# Altium PCB PCB_main.PcbDoc
Units mil, origin at the board's own origin, x right, y up, seen from the top; angles counter-clockwise.
Board outline 2110 x 1020 mil, 2 copper layers (Top Layer, Bottom Layer); 36 components, 29 nets, 142 pads, 36 vias.
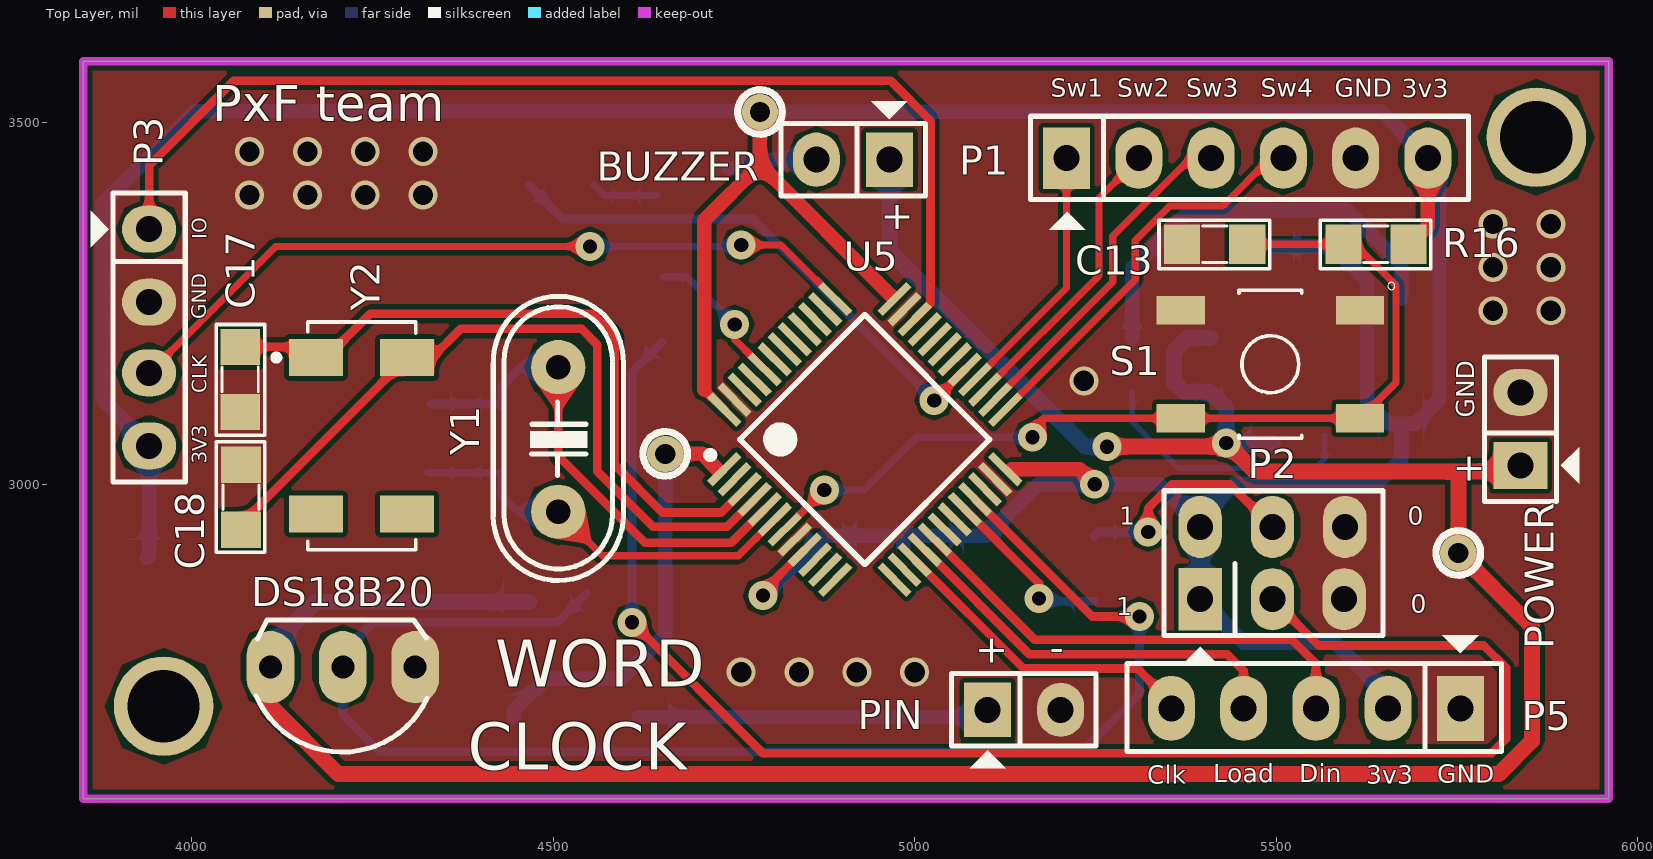
[diagram p0: Top Layer view]
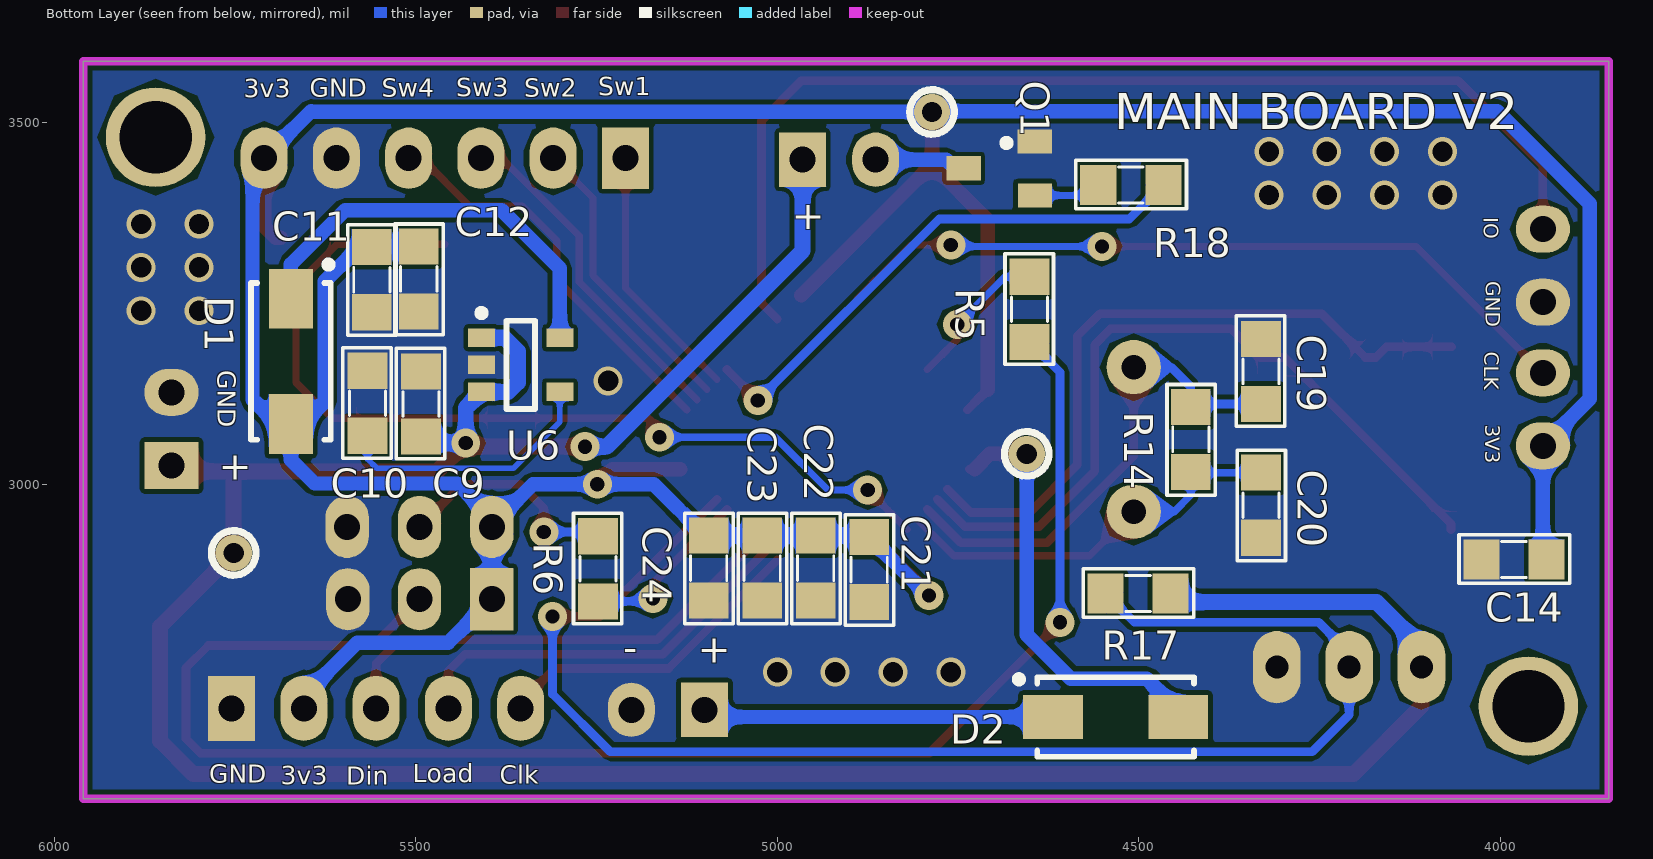
[diagram p1: Bottom Layer view, seen from below]
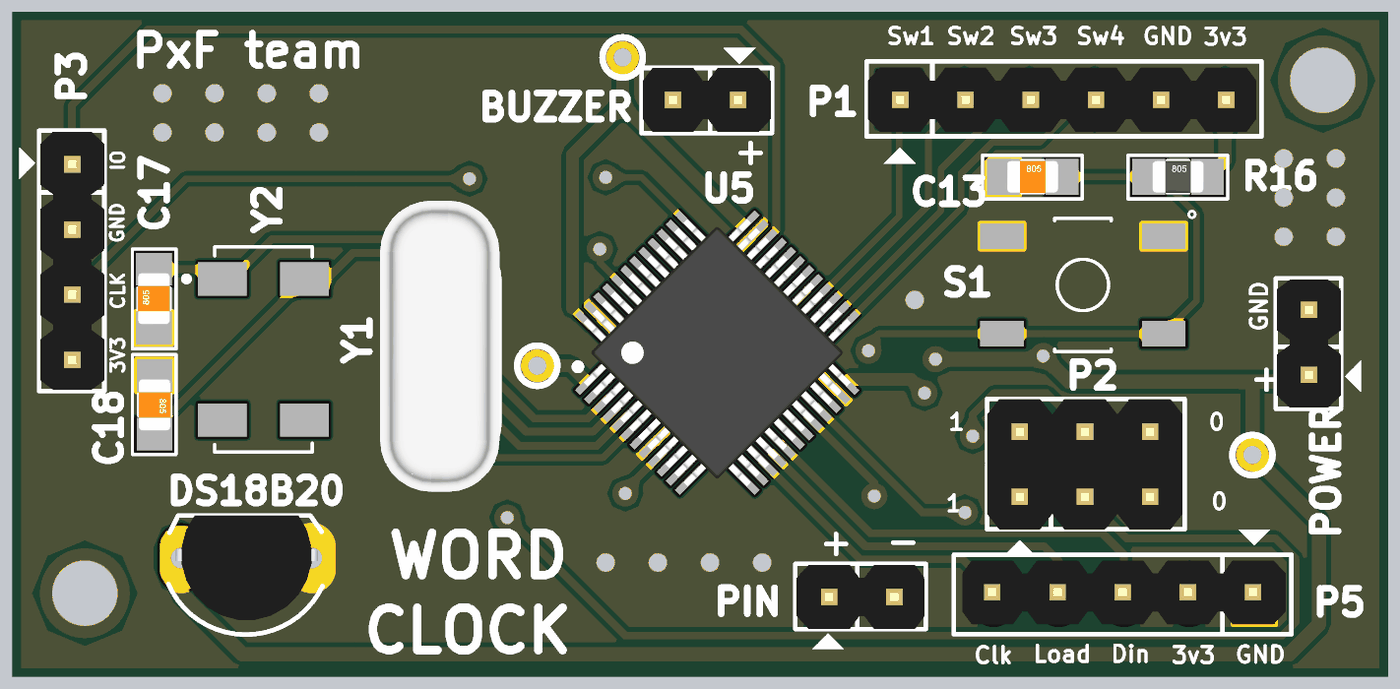
[diagram p2: 3D render of the assembled board from above, using the file's embedded part models]
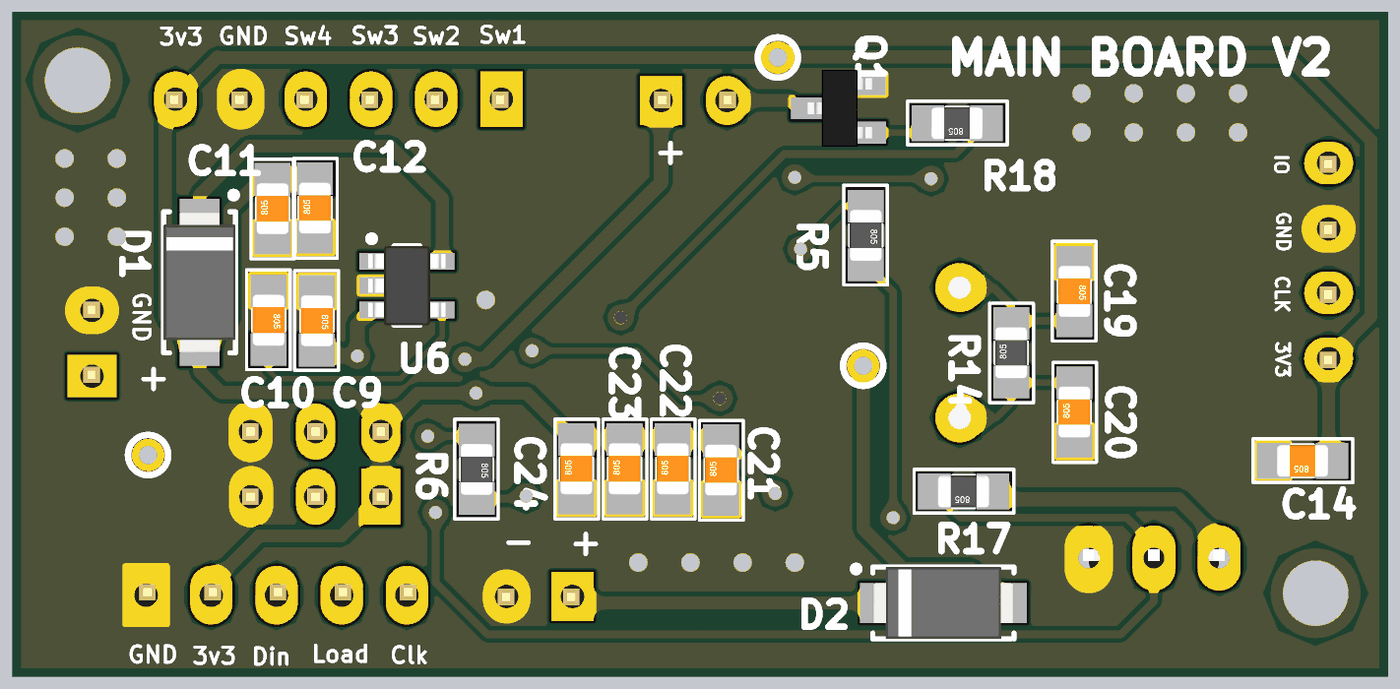
[diagram p3: 3D render of the assembled board from below, using the file's embedded part models]

## Layer stack, top to bottom
Top Solder: solder mask 0.4, Solder Resist, Dk 3.5
Top Layer: signal copper 1.4
Dielectric 1: dielectric 12.6, FR-4, Dk 4.8
Bottom Layer: signal copper 1.4
Bottom Solder: solder mask 0.4, Solder Resist, Dk 3.5

## Board outline
3850,2565 3850,3585 5960,3585 5960,2565

## Design rules (kind name [scope] priority, off if disabled: settings)
Clearance [All] p1: gap=6 ignorepadtopadclearanceinfootprint=FALSE except(0: Arc-Hole Track-Hole SMDPad-Hole THPad-Hole Via-Hole Fill-Hole Poly-Hole Region-Hole Text-Hole)
PlaneConnect [All] p1: planeconnectstyle=Direct reliefexpansion=20 reliefentries=4 reliefconductorwidth=15 reliefairgap=8
PolygonConnect [All] p1: connectstyle=Direct reliefconductorwidth=10 reliefentries=4 polygonreliefangle="90 Angle" airgapwidth=10
RoutingVias [All] p1: holewidth=19.68 width=40 viastyle="Through Hole" minholewidth=15.75 minwidth=40 maxholewidth=27.56 maxwidth=40
SolderMaskExpansion [All] p1: expansion=4
Width [All] p1: maxlimit=50 minlimit=6 preferedwidth=8
29 further rules are at their usual default settings.

## Components (designator, comment, footprint, x,y, rotation, side; value= is the part's Value field where it differs from the comment)
BUZZER "Domino 2" JP2 4965,3449 r180 top (schematic designator P6)
C9 "Cap Non-Pol SMD" CAP-SM-0805 5493,3156 r270 bottom value=105
C10 "Cap Non-Pol SMD" CAP-SM-0805 5567,3157 r270 bottom value=223
C11 "Cap Non-Pol SMD" CAP-SM-0805 5561,3238 r90 bottom value=106
C12 "Cap Non-Pol SMD" CAP-SM-0805 5496,3239 r90 bottom value=104
C13 "Cap Non-Pol SMD" CAP-SM-0805 5370,3332 r0 top value=105
C14 "Cap Non-Pol SMD" CAP-SM-0805 3936,2896 r0 bottom value=104
C17 "Cap Non-Pol SMD" CAP-SM-0805 4067,3100 r90 top value=20p
C18 "Cap Non-Pol SMD" CAP-SM-0805 4068,3027 r270 top value=20p
C19 "Cap Non-Pol SMD" CAP-SM-0805 4331,3201 r270 bottom value=20p
C20 "Cap Non-Pol SMD" CAP-SM-0805 4331,2926 r90 bottom value=20p
C21 "Cap Non-Pol SMD" CAP-SM-0805 4873,2837 r90 bottom value=104
C22 "Cap Non-Pol SMD" CAP-SM-0805 4947,2839 r90 bottom value=104
C23 "Cap Non-Pol SMD" CAP-SM-0805 5021,2839 r90 bottom value=104
C24 "Cap Non-Pol SMD" CAP-SM-0805 5095,2839 r90 bottom value=104
D1 "D Schottky" SS34 5673,3170 r270 bottom
D2 "D Schottky" SS34 4532,2678 r180 bottom
DS18B20 "Header 3" QTO-92 4209,2747 r180 top
P1 "Header 6" JP6 5210,3451 r0 top
P2 "Header 3X2" JP3x2 5495,2891 r0 top
P3 "Header 4" JP4 3941,3253 r270 top
P5 "Header 5" JP5 5755,2690 r180 top
PIN "Header 2" JP2 5101,2688 r0 top (schematic designator P7)
POWER "Header 2" JP2 5838,3026 r90 top (schematic designator P8)
Q1 "C1815" SOT23B 4693,3437 r90 bottom
R5 "RESISTOR SMD" RES-SM-0805 4651,3287 r270 bottom value=100K
R6 "RESISTOR SMD" RES-SM-0805 5248,2928 r270 bottom value=100K
R14 "RESISTOR SMD" RES-SM-0805 4428,3017 r90 bottom value=1M
R16 "RESISTOR SMD" RES-SM-0805 5593,3332 r0 top value=10K
R17 "RESISTOR SMD" RES-SM-0805 4456,2849 r0 bottom value=4K7
R18 "RESISTOR SMD" RES-SM-0805 4466,3414 r0 bottom value=27k
S1 "TL3342F160QG" SW_TL3342F160QG 5492,3166 r180 top
U5 "STM32F103C8Tx" TSQFP50P900X900X160-48N 4931,3062 r45 top
U6 "RT9193" SOT95P279X129-5N 5355,3165 r180 bottom
Y1 "XTAL" XT2 4507,3062 r270 top
Y2 "Xtal32768" XTAL_ABS25-32.768KHZ-6-1-T 4235,3067 r0 top

## Footprints (in the part's own frame and the unit in brackets; to place one, negate y for a bottom-side part, rotate by r counter-clockwise, add the part's x,y. Pads: shape width x height; smd on the part's side, far side on the other; paste and mask are expansions set on the pad)
CAP-SM-0805 [mil]
  rect 50x55 smd: 1(0,0) 2(90,0)
  silkscreen extent -32,-34 121,33, body extent 6,-25 84,25, height 31
JP2 [mil]
  rect 65x75 hole 36: 1(0,0)
  oval 65x75 hole 36: 2(101,0)
  silkscreen extent -50,-81 150,50, body extent -48,-50 148,48, height 323
JP3x2 [mil] "Connector 3x2"
  rect 60x86 hole 36: 1(-100,-50)
  oval 60x86 hole 36: 2(0,-50) 3(99,-50) 4(-100,50) 5(0,50) 6(100,50)
  silkscreen extent -150,-141 153,100, body extent -150,-100 150,100, height 335
JP4 [mil] "Jumper 4"
  oval 65x75 hole 36: 1(-100,0) 2(1,0) 3(99,0) 4(200,0)
  silkscreen extent -150,-81 250,50, body extent -148,-48 248,50, height 323
JP5 [mil] "JP5"
  rect 65x90 hole 36: 1(0,0)
  oval 65x90 hole 36: 2(100,0) 3(200,0) 4(300,0) 5(400,0)
  silkscreen extent -57,-101 461,60, body extent -48,-53 448,45, height 323
JP6 [mil] "JP6"
  rect 65x85 hole 36: 1(0,0)
  oval 65x85 hole 36: 2(100,0) 3(200,0) 4(300,0) 5(400,0) 6(500,0)
  silkscreen extent -50,-99 556,58, body extent -48,-50 548,48, height 323
QTO-92 [mil] "TO-92"
  oval 66x100 hole 32: 1(-100,0) 2(0,0) 3(100,0)
  silkscreen extent -117,-65 120,118, body extent -109,-66 109,95, height 245
RES-SM-0805 [mil]
  rect 50x55 smd: 1(0,0) 2(90,0)
  silkscreen extent -32,-34 121,33, body extent 6,-25 84,25, height 31
SOT23B [mm] "SOT 23B"
  rect 0.85x1.2 smd: 1(0.94,-1.245) 2(0,1.25) 3(-0.95,-1.25)
  silkscreen extent 0.77,-0.38 1.02,-0.13, body extent -1.5,-1.3 1.5,1.2, height 1.06
SOT95P279X129-5N [mm] "SOT23, 5-Leads, Body 2.90x2.79mm, Pitch 0.95mm, IPC Medium Density"
  rect 0.95x0.65 smd: 1(-1.375,0.95) 2(-1.375,0) 3(-1.375,-0.95) 4(1.375,-0.95) 5(1.375,0.95)
  silkscreen extent -1.5,-1.55 0.5,1.95, body extent -1.5,-1.55 1.5,1.55, height 1.3
SS34 [mm] "DO-214-AC/SMA Molded Diode, Body 5.3x2.6mm, IPC Medium Density"
  rect 2.1x1.55 smd: 1(-2.2,0) 2(2.2,0)
  silkscreen extent -3.52,-1.4 2.75,1.45, body extent -2.75,-1.4 2.75,1.4, height 2.3
SW_TL3342F160QG [mm]
  rect 1.7x1 smd: 1(-3.15,-1.9) 2(3.15,-1.9) 3(-3.15,1.9) 4(3.15,1.9)
  silkscreen extent -4.38,-2.88 1.1,2.6
TSQFP50P900X900X160-48N [mm] "TSQFP, 48-Leads, Body 7.00x7.00mm, Pitch 0.50mm, IPC Medium Density"
  rect 1.45x0.27 smd: 1(-4.225,2.75) 2(-4.225,2.25) 3(-4.225,1.75) 4(-4.225,1.25) 5(-4.225,0.75) 6(-4.225,0.25) 7(-4.225,-0.25) 8(-4.225,-0.75) 9(-4.225,-1.25) 10(-4.225,-1.75) 11(-4.225,-2.25) 12(-4.225,-2.75) 25(4.225,-2.75) 26(4.225,-2.25) 27(4.225,-1.75) 28(4.225,-1.25) 29(4.225,-0.75) 30(4.225,-0.25) 31(4.225,0.25) 32(4.225,0.75) 33(4.225,1.25) 34(4.225,1.75) 35(4.225,2.25) 36(4.225,2.75)
  rect 0.27x1.45 smd: 13(-2.75,-4.225) 14(-2.25,-4.225) 15(-1.75,-4.225) 16(-1.25,-4.225) 17(-0.75,-4.225) 18(-0.25,-4.225) 19(0.25,-4.225) 20(0.75,-4.225) 21(1.25,-4.225) 22(1.75,-4.225) 23(2.25,-4.225) 24(2.75,-4.225) 37(2.75,4.225) 38(2.25,4.225) 39(1.75,4.225) 40(1.25,4.225) 41(0.75,4.225) 42(0.25,4.225) 43(-0.25,4.225) 44(-0.75,4.225) 45(-1.25,4.225) 46(-1.75,4.225) 47(-2.25,4.225) 48(-2.75,4.225)
  silkscreen extent -4.35,-3.1 3.1,3.57, body extent -4.5,-4.5 4.5,4.5, height 1.6
XT2 [mil] "Footpin for Crystal 2 pin"
  round 75 hole 34: 1(-100,0) 2(100,0)
  silkscreen extent -198,-90 195,90, body extent -233,-93 213,90, height 138
XTAL_ABS25-32.768KHZ-6-1-T [mm]
  rect 1.9x1.3 smd: 1(-1.6,2.75) 2(-1.6,-2.75) 3(1.6,-2.75) 4(1.6,2.75)
  silkscreen extent -3.11,-4 1.9,4

## Part data
BUZZER: "Domino, 2-Pin", LatestRevisionDate=17-Jul-2002, LatestRevisionNote="Re-released for DXP Platform.", Publisher="Altium Limited"
C9 C10 C11 C12 C13 C14 C17 C18 C19 C20 C21 C22 C23 C24: "Capacitor"
D1 D2: "Schottky Diode", Code_JEDEC=DO-214-AA, LatestRevisionDate=17-Jul-2002, LatestRevisionNote="Re-released for DXP Platform.", PackageDescription="DO-214-AA/SMB; 2 C-Bend Leads; Body 5.3 x 3.6 mm, inc. leads (LxW)", PackageReference=SMB, Published=8-Jun-2000, Publisher="Altium Limited"
DS18B20: "Header, 3-Pin", LatestRevisionDate=17-Jul-2002, LatestRevisionNote="Re-released for DXP Platform.", Publisher="Altium Limited"
P1: "Header, 6-Pin", LatestRevisionDate=17-Jul-2002, LatestRevisionNote="Re-released for DXP Platform.", Publisher="Altium Limited"
P2: "Header, 3-Pin, Dual row", LatestRevisionDate=17-Jul-2002, LatestRevisionNote="Re-released for DXP Platform.", Publisher="Altium Limited"
P3: "Header, 4-Pin", LatestRevisionDate=17-Jul-2002, LatestRevisionNote="Re-released for DXP Platform.", Publisher="Altium Limited"
P5: "Header, 5-Pin", LatestRevisionDate=17-Jul-2002, LatestRevisionNote="Re-released for DXP Platform.", Publisher="Altium Limited"
PIN POWER: "Header, 2-Pin", LatestRevisionDate=17-Jul-2002, LatestRevisionNote="Re-released for DXP Platform.", Publisher="Altium Limited"
Q1: "NPN Bipolar Transistor"
R5 R6 R14 R16 R17 R18: "Resistor"
S1: "TL3342 Series SPST 1.6 N Round Button Gull Wing Surface Mount Tactile Switch", Package=None, Availability=Good, MF=E-Switch, MP=TL3342F160QG, Price="0.41 USD", SnapEDA_Link=https://www.snapeda.com/parts/TL3342F160QG/E-Switch/view-part/?ref=snap
U5: "MCU 32-bit STM32F ARM Cortex M3 RISC 64KB Flash 2.5V/3.3V 48-Pin LQFP Tray", Manufacturer=STMicroelectronics, Manufacturer Part Number=STM32F103C8T6, Maximum Frequency=72MHz, Maximum Operating Temperature="+85 °C", Minimum Operating Temperature="-40 °C", Package Type=LQFP, Supplier Part Number 1=497-6063-ND, Typical Operating Supply Voltage="2 ? 3.6 V", ADC Channels=10, ADC Resolution=12bit, ADCs="2(10 x 12 bit)", ComponentLink1Description=https://datasheet.ciiva.com/16210/cd00161566-16210248.pdf, ComponentLink1URL=https://datasheet.ciiva.com/16210/cd00161566-16210248.pdf, ComponentLink2Description=https://datasheet.ciiva.com/14100/pustm-arm-microcont-stm32f103-en-14100508.pdf, ComponentLink2URL=https://datasheet.ciiva.com/14100/pustm-arm-microcont-stm32f103-en-14100508.pdf, ComponentLink3Description=https://datasheet.ciiva.com/15122/getdatasheetpartid-69880-15122076.pdf, ComponentLink3URL=https://datasheet.ciiva.com/15122/getdatasheetpartid-69880-15122076.pdf, ComponentLink4Description=https://datasheet.ciiva.com/8054/1730126-8054942.pdf, ComponentLink4URL=https://datasheet.ciiva.com/8054/1730126-8054942.pdf, ComponentLink5Description=https://datasheet.ciiva.com/48687/001075658-da-01-en-mcu-64kb-mem-stm32f103c8t6-lqfp-48-stm-48687589.pdf, ComponentLink5URL=https://datasheet.ciiva.com/48687/001075658-da-01-en-mcu-64kb-mem-stm32f103c8t6-lqfp-48-stm-48687589.pdf, ComponentLink6Description=https://datasheet.ciiva.com/26816/stm32f103c8t6-26816902.pdf, ComponentLink6URL=https://datasheet.ciiva.com/26816/stm32f103c8t6-26816902.pdf, Data Bus Width=32bit, Device Core="ARM Cortex M3", Dimensions="7.2 x 7.2 x 1.45mm", Family Name=STM32F, Height=1.45mm, Instruction Set Architecture=RISC, Length=7.2mm, Mounting Type="Surface Mount", Number of ADC Units=2, Number of CAN Channels=1, Number of I2C Channels=2, Number of PWM Units=1, Number of SPI Channels=2, Number of Timers=3, Number of USART Channels=3, Pin Count=48, Pricing 1="1=6.06, 10=5.438, 100=4.4558, 500=3.7931, 1000=3.199 (USD)", Program Memory Size="64 kB", Program Memory Type=Flash, Pulse Width Modulation="1(16 bit) (Motor Control)", PWM Resolution=16bit, RAM Size="20 kB", Stock 1=2771, Supplier 1=Digi-Key, Timer Resolution=16bit, Timers="3 x 16 bit", USB Channels="1 x Device", Width=7.2mm
U6: "RICHTEK         RT9193-15GB            IC, LDO, FIXED, 1.5V, 0.3A, SOT-23-5", Input Voltage Max=5.5V, Input Voltage Min=2.5V, LDO Regulator Case Style=SOT-23, Manufacturer=Richtek, Manufacturer Part Number=RT9193-15GB, Operating Temperature Max=85°C, Operating Temperature Min=-40°C, Output Current=300mA, Output Voltage Nom.=1.5V, Supplier Part Number 1=42AC0083, ComponentLink1Description=http://www.farnell.com/datasheets/1720535.pdf, ComponentLink1URL=http://www.farnell.com/datasheets/1720535.pdf, ComponentLink2Description=http://www.richtek.com/assets/product_file/RT9193/DS9193-16.pdf, ComponentLink2URL=http://www.richtek.com/assets/product_file/RT9193/DS9193-16.pdf, No. of Pins=5Pins, Packaging=Each, Stock 1=2999, Supplier 1=Newark, SVHC="No SVHC (17-Dec-2015)"
Y1: "Crystal Oscillator", LatestRevisionDate=17-Jul-2002, LatestRevisionNote="Re-released for DXP Platform.", PackageDescription="Crystal, Thru-Hole; 2 Leads; Body 3.1 x 8.2 mm (Dia.xH)", PackageReference=R38, Published=8-Jun-2000, Publisher="Altium Limited"

## Free pads (board coordinates)
  round 137.8 hole 100: 3(3961,2693) 3(5860,3480)

## Via types
v1: diameter 40, hole 28, Top Layer to Bottom Layer, tented both sides, 19 vias
v2: diameter 40, hole 19.68, Top Layer to Bottom Layer, tented both sides, 14 vias
v3: diameter 50, hole 28, Top Layer to Bottom Layer, 3 vias

## Nets (pads, with @x,y where several pads share a name; then routed paths per layer and width w, separated by ;. In a path a pad name is that pad's centre, name@x,y a point inside that pad or via, vN(x,y) a via of type N, cw(c..) or ccw(c..) an arc to the next point about the centre after c; other vN are vias at no path point)
5V: BUZZER.1 C9.2 DS18B20.3 POWER.1 R17.1 U6.1 U6.3 | length 4118.9
  Top Layer w22: DS18B20.3 4109,2693 4203,2599 5808,2599 5854,2645 5854,2803 v3(5752,2905) 5752,3012.72 5747,3017.72 ; v2(5266,3052) 5420,3052 5423,3049 v2(5431,3057) 5470.28,3017.72 5747,3017.72 ; POWER.1@5838,3017.72 5747,3017.72
  Bottom Layer w22: DS18B20.3 4109,2775 4171,2837 R17.1@4467,2837 ; BUZZER.1 4965,3323 5236,3052 v2(5266,3052) ; U6.1 5377.4,3202.4 5359,3184 5359,3141 5372.4,3127.6 U6.3 5431,3105.73 v2(5431,3057) C9.2@5496,3057
ADC: DS18B20.2 R17.2 U5.21 | length 2015.1
  Top Layer w12: U5.21 5245.6,2817 v2(5311,2817)
  Bottom Layer w12: R17.2 4506,2809 4251,2809 4209,2767 DS18B20.2 4209,2681 4260,2630 5231.24,2630 5311,2709.76 v2(5311,2817)
BOOT0: R5.1 U5.44 | length 206.8
  Top Layer w10: v2(4751,3221) 4751,3200.24 U5.44
  Bottom Layer w10: R5.1 4685,3287 v2(4751,3221)
BOOT1: R6.2 U5.20 | length 243.4
  Top Layer w12: U5.20 5172,2862.76 v2(5172,2842)
  Bottom Layer w12: v2(5172,2842) 5176,2838 R6.2
BUZZER: R18.1 U5.29 | length 744.8
  Top Layer w12: v2(5027,3116) 5069.5,3158.5 U5.29
  Bottom Layer w12: R18.1 4513,3367 4776,3367 v2(5027,3116)
CLK: P5.5 U5.15 | length 445
  Top Layer w12: U5.15 5150.56,2745 5308,2745 5355,2698 P5.5
DIN_U1: P5.3 U5.17 | length 660.3
  Top Layer w12: U5.17 5166.24,2785 5522,2785 5555,2752 P5.3
GND: C9.1 C10.1 C11.1 C12.1 C13.1 C14.2 C17.1 C18.1 C19.1 C20.1 C21.1 C22.1 C23.1 C24.1 DS18B20.1 P1.5 P2.3 P2.6 P3.2 P5.1 PIN.2 POWER.2 Q1.1 S1.1 S1.2 U5.8 U5.23 U5.35 U5.47 U6.2
  other v1: 4760,2740 4840,2740 4920,2740 5000,2740 5234,3143 5800,3240 5880,3240 5800,3300 5880,3300 5800,3360 5880,3360 4080,3400 4160,3400 4240,3400 4320,3400 4080,3460 4160,3460 4240,3460 4320,3460
LOAD: P5.4 U5.16 | length 562.6
  Top Layer w12: U5.16 5158.4,2765 5432,2765 5455,2742 P5.4
NetC10_2: C10.2 U6.4 | length 371.5
  Bottom Layer w8: U6.4 5300.87,3086.13 5365,3022 5554,3022 5567,3035 C10.2
NetD1_1: D1.1 U6.5 | length 580.2
  Bottom Layer w20: U6.5 5300.87,3298.87 5381,3379 5598,3379 5673,3304 D1.1
NetD2_1: D2.1 PIN.1 | length 481.8
  Bottom Layer w20: D2.1 5082,2678 PIN.1@5095,2665
NetP2_2: P2.2 R5.2 | length 2158
  Top Layer w12: v2(4609,2809) 4790,2628 5798,2628 5818,2648 5818,2746 5787,2777 5559,2777 P2.2
  Bottom Layer w12: v2(4609,2809) 4609,3155 R5.2
NetP2_5: P2.5 R6.1 | length 320.6
  Top Layer w12: v2(5323,2934) 5323,2967 5356,3000 5436,3000 P2.5
  Bottom Layer w12: R6.1 5254,2934 v2(5323,2934)
NetP6_2: BUZZER.2 Q1.2 | length 126.8
  Bottom Layer w20: Q1.2 4754.21,3437 4766.21,3449 BUZZER.2
NetQ1_3: Q1.3 R18.2 | length 93.8
  Bottom Layer w10: R18.2 4570.4,3399.6 Q1.3
NRST: C13.2 R16.1 S1.3 S1.4 U5.7 | length 1299.9
  Top Layer w10: U5.7 4820.42,2937.42 v2(4875,2992) ; v2(5163,3065) 5163,3076 5178.2,3091.2 S1.4 S1.3 5666,3141.18 5666,3275 5609,3332 R16.1 C13.2
  Bottom Layer w10: v2(4875,2992) 4930,2992 5003,3065 v2(5163,3065)
OSCIN: C19.2 R14.2 U5.5 Y1.1 | length 694.2
  Top Layer w12: Y1.1 4507,3039 4627,2919 4746.24,2919 U5.5
  Bottom Layer w12: C19.2 4424,3111 R14.2 4428,3135 4455,3162 Y1.1
OSCOUT: C20.2 R14.1 U5.6 Y1.2 | length 568.5
  Top Layer w10: Y1.2 4568,2901 4756.08,2901 U5.6
  Bottom Layer w10: C20.2@4326,3016 C20.2 4427,3016 R14.1 4428,2985 4451,2962 Y1.2
PC14: C17.2 U5.3 Y2.1 | length 960.4
  Top Layer w12: C17.2 4157.28,3190 Y2.1 4186.27,3175.27 4247,3236 4554,3236 4585,3205 4585,3027 4651,2961 4732.56,2961 U5.3
PC15: C18.2 U5.4 Y2.4 | length 1062.4
  Top Layer w12: C18.2 4068,2945.28 Y2.4 4332.27,3175.27 4372,3215 4539,3215 4561,3193 4561,3018 4638,2941 4740.4,2941 U5.4
SWCLK: P3.3 U5.37 | length 1079.2
  Top Layer w10: P3.3 4116,3329 v2(4551,3329) ; v2(4760,3331) 4815.11,3331 U5.37
  Bottom Layer w10: v2(4551,3329) 4773,3329 4771,3331 v2(4760,3331)
SWIO: P3.1 U5.34 | length 1524.1
  Top Layer w12: P3.1 3941,3441 4058,3558 4967,3558 5022,3503 5022,3250.44 U5.34
T1: P1.1 U5.28 | length 358.6
  Top Layer w10: U5.28 5210,3271.4 P1.1
T2: P1.2 U5.27 | length 408.2
  Top Layer w10: U5.27 5255,3288.56 5255,3396 P1.2
T3: P1.3 U5.26 | length 474.4
  Top Layer w10: U5.26 5274,3279.73 5274,3343.48 5381.52,3451 P1.3
T4: P1.4 U5.25 | length 560.6
  Top Layer w10: U5.25 5305.11,3283 5305.11,3337.11 5353,3385 5426,3385 5492,3451 P1.4
Vbat: D2.2 U5.1 | length 600.4
  Top Layer w12: 4727.06,3020.94 U5.1@4734.32,3020.94
  Top Layer w20: v3(4655,3042) 4706,3042 4727.06,3020.94
  Bottom Layer w20: D2.2 4445.39,2687.39 4489,2731 4594,2731 4655,2792 v3(4655,3042)
VCC3V3: C11.2 C12.2 C14.1 C21.2 C22.2 C23.2 C24.2 D1.2 P1.6 P2.1 P2.4 P3.4 P5.2 R16.2 U5.9 U5.24 U5.36 U5.48 | length 5721.9
  Top Layer w12: 4709,3130.89 U5.48 ; v2(4790,2846) 4790,2851.4 U5.9
  Top Layer w20: 4709,3130.89 4709,3365.24 4786,3442.24 ; v3(4786,3515) 4786,3442.24 ; 4966.62,3261.62 4786,3442.24 ; 5134,3020.94 5228.06,3020.94 v2(5249,3000) ; R16.2@5687,3341 5694,3341 5710,3357 P1.6
  Bottom Layer w12: v2(5249,3000) v2@5251,3000
  Bottom Layer w20: C14.1@3938,2898 3941,2901 P3.4 3876,3118 3876,3388 4004,3516 4785,3516 v3(4786,3515) 5644,3515 5645,3516 P1.6 5726,3435 5726,3117 5692.39,3083.39 D1.2 ; v2(4790,2846) 4792,2846 C21.2 ; C21.2@4879,2932 4882,2929 C22.2 C23.2 C24.2 5100,2929 5171,3000 v2(5249,3000) ; v2@5251,3000 5338,3000 5385,2953 P2.4@5395,2953 ; P2.1 5455,2781 5581,2781 P5.2@5655,2707 ; P2.1@5395,2853 P2.4 P2.4@5395,2953 ; C12.2 5560,3329 C11.2 5579,3328 5626,3281 5626,3114 5656.61,3083.39 D1.2 ; P2.4@5395,2953 5443,3001 5640,3001 5673,3034 D1.2
pads on no net: U5.2 U5.10 U5.11 U5.12 U5.13 U5.14 U5.18 U5.19 U5.22 U5.30 U5.31 U5.32 U5.33 U5.38 U5.39 U5.40 U5.41 U5.42 U5.43 U5.45 U5.46 Y2.2 Y2.3

## Polygon pours and split planes (outlines as drawn)
GND on Bottom Layer "GND_L02_P030" (solid, remove dead copper, pour order 30): 3690,3723 3711,3702 6059,3702 6059,2477 6061,2475 6047,2461 3728,2461
GND on Top Layer "GND_L01_P032" (solid, remove dead copper, pour order 32): 3764,3752 6050,3752 6069,3733 6042,3706 6042,2513 3826,2513 3797,2542

## Keep-outs
Keep-Out Layer:
  the board outline again, w12

## Silkscreen, mask and mechanical layers (free items; w line width, h text height)
Top Overlay:
  circle w10: c4786,3515 r30.81
  circle w10: c4655,3042 r30.81
  circle w10: c5752,2905 r30.81
  text "Sw1" at 5188,3536 h25
  text "Sw2" at 5280,3536 h25
  text "Sw3" at 5376,3536 h25
  text "Sw4" at 5479,3536 h25
  text "GND" at 5581,3536 h25
  text "3v3" at 5674,3535 h25
  text "PxF team" at 4028,3502 h50
  text "+" at 4953,3353 h40
  text "IO" at 4021,3339 h20 r90
  text "GND" at 4020,3228 h20 r90
  text "CLK" at 4021,3126 h20 r90
  text "GND" at 5774,3092 h25 r90
  text "3V3" at 4021,3028 h20 r90
  text "+" at 5744.22,3004.95 h40
  text "1" at 5283,2944 h25
  text "0" at 5682,2944 h25
  text "0" at 5686,2822 h25
  text "1" at 5279,2819 h25
  text "-" at 5187,2755 h40
  text "+" at 5084,2753 h40
  text "WORD" at 4420,2720 h65
  text "CLOCK" at 4382,2605 h65
  text "Load" at 5413,2588 h25
  text "Din" at 5532,2588 h25
  text "GND" at 5723,2587 h25
  text "Clk" at 5322,2586 h25
  text "3v3" at 5625,2586 h25
Bottom Overlay:
  circle w10: c4786,3515 r30.81
  circle w10: c4655,3042 r30.81
  circle w10: c5752,2905 r30.81
  text "Sw1" at 5248,3538 h25
  text "Sw3" at 5444,3537 h25
  text "Sw2" at 5350,3536 h25
  text "Sw4" at 5547,3536 h25
  text "GND" at 5647,3536 h25
  text "3v3" at 5738,3535 h25
  text "MAIN BOARD V2" at 4534,3491 h50
  text "IO" at 4023,3369 h20 r90
  text "+" at 4980,3353 h40
  text "GND" at 4020,3281 h20 r90
  text "CLK" at 4022,3183 h20 r90
  text "GND" at 5774,3158 h25 r90
  text "3V3" at 4021,3082 h20 r90
  text "+" at 5773,3006 h40
  text "-" at 5213,2755 h40
  text "+" at 5110,2753 h40
  text "Load" at 5504,2588 h25
  text "GND" at 5786,2587 h25
  text "Clk" at 5384,2586 h25
  text "3v3" at 5687,2585 h25
  text "Din" at 5596,2584 h25
  text "-" at 3097,1974 h25